# Altium PCB FPGA.PcbDoc
Units mm, origin at the board's own origin, x right, y up, seen from the top; angles counter-clockwise.
Board outline 17.78 x 55.24 mm, 2 copper layers (Top Layer, Bottom Layer); 56 components, 66 nets, 267 pads, 76 vias.
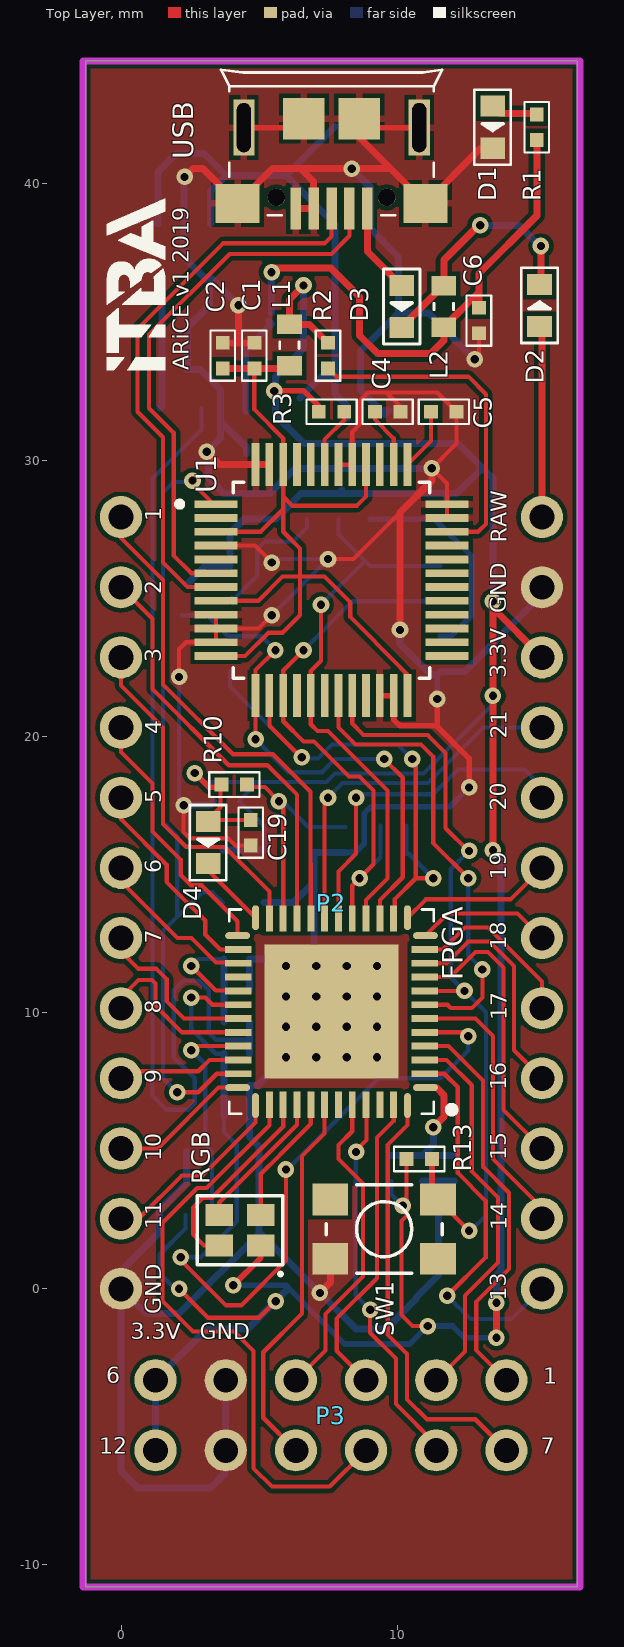
[diagram p0: Top Layer view]
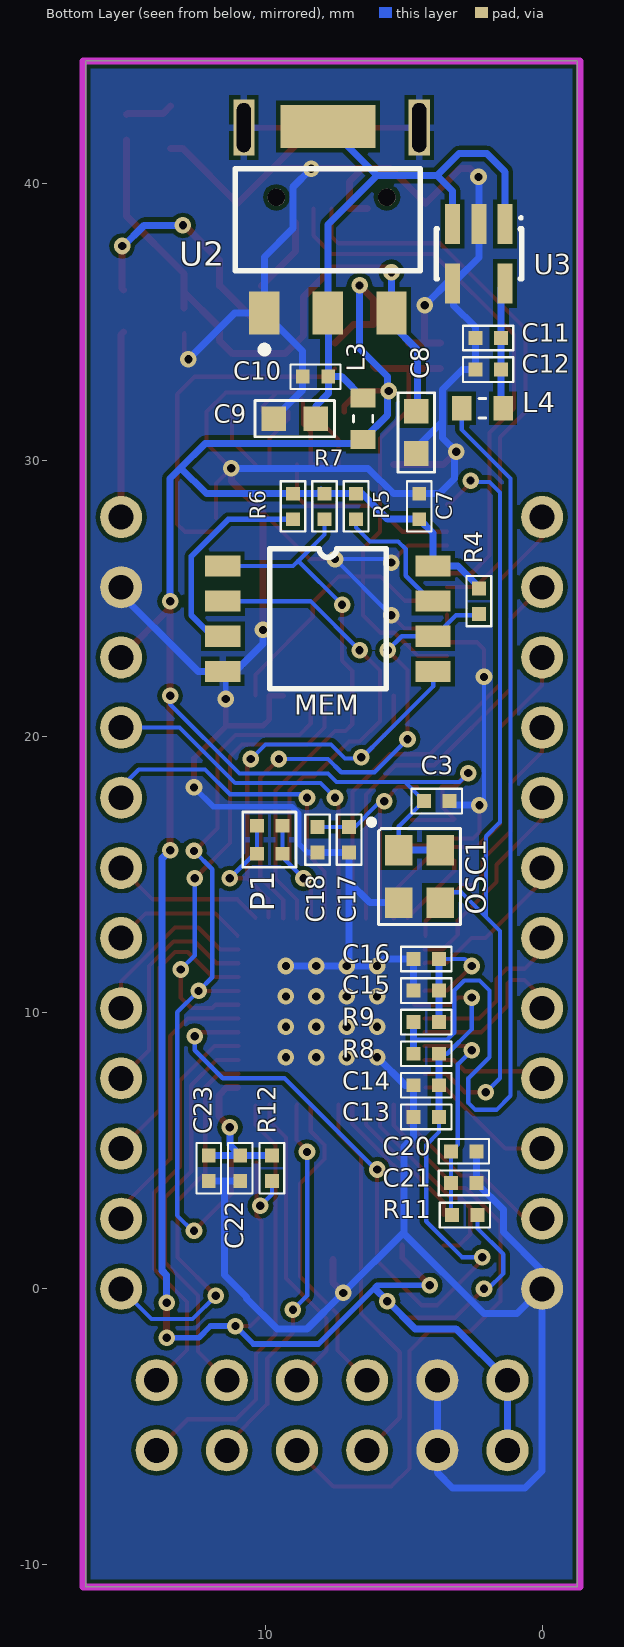
[diagram p1: Bottom Layer view, seen from below]

## Layer stack, top to bottom
Top Solder: solder mask 0.0102, Solder Resist, Dk 3.5
Top Layer: signal copper 0.0356
Dielectric1: dielectric 0.32, FR-4, Dk 4.8
Bottom Layer: signal copper 0.0356
Bottom Solder: solder mask 0.0102, Solder Resist, Dk 3.5

## Board outline
-1.27,-10.795 -1.27,44.45 16.51,44.45 16.51,-10.795 -1.27,-10.795

## Design rules (kind name [scope] priority, off if disabled: settings)
Clearance [All] p1: gap=0.152 ignorepadtopadclearanceinfootprint=FALSE
DiffPairsRouting [All] p1: maxlimit=0.254 minlimit=0.254 mostfreqgap=0.254 toplayer_minwidth=0.381 toplayer_maxwidth=0.381 toplayer_prefwidth=0.381 bottomlayer_minwidth=0.381 bottomlayer_maxwidth=0.381 bottomlayer_prefwidth=0.381 maxuncoupledlength=12.7
PlaneClearance [All] p1: clearance=0.2
PlaneConnect [All] p1: planeconnectstyle=Relief reliefexpansion=0.5 reliefentries=4 reliefconductorwidth=0.254 reliefairgap=0.2
PolygonConnect PolygonConnect_ReliefFLASH [HasFootprint('SOP8FLASHCORRECT')] p1: connectstyle=Relief reliefconductorwidth=0.254 reliefentries=4 polygonreliefangle="90 Angle" airgapwidth=0.15
PolygonConnect PolygonConnect_ReliefUSB [HasFootprint('MICRO-USB5+4P-SMD-0.65-B')] p2: connectstyle=Relief reliefconductorwidth=0.254 reliefentries=4 polygonreliefangle="90 Angle" airgapwidth=0.15
PolygonConnect PolygonConnect_ReliefFTDI [HasFootprint('QFP50P900X900X160-48N')] p3: connectstyle=Relief reliefconductorwidth=0.254 reliefentries=4 polygonreliefangle="90 Angle" airgapwidth=0.15
PolygonConnect [All] p4: connectstyle=Direct reliefconductorwidth=0.25 reliefentries=4 polygonreliefangle="90 Angle" airgapwidth=0.2
RoomDefinition Misc [InComponentClass('Misc')] p1: confinementstyle=ConfineIn formatcopy=TRUE lockcomponents=FALSE outline -2.3,-11.5 16.95,-11.5 16.95,45.1 -2.3,45.1
RoomDefinition FTDI [InComponentClass('FTDI')] p2: confinementstyle=ConfineIn formatcopy=TRUE lockcomponents=FALSE outline -1.9,-11.3 17.05,-11.3 17.05,44.8 -1.9,44.8
RoomDefinition FPGA [InComponentClass('FPGA')] p3: confinementstyle=ConfineIn formatcopy=TRUE lockcomponents=FALSE outline -1.65,-10.7 16.7,-10.7 16.7,44.5 -1.65,44.5
RoutingVias [All] p1: holewidth=0.3 width=0.6 viastyle="Through Hole" minholewidth=0.3 minwidth=0.6 maxholewidth=0.3 maxwidth=0.6
SilkToSolderMaskClearance SilkscreenOverComponentPads [IsPad] p1: minsilkscreentomaskgap=0.152 clearancetoexposedcopper=TRUE
SolderMaskExpansion [All] p1: expansion=0.102 istentingtop=FALSE
Width [All] p1: maxlimit=0.254 minlimit=0.152 preferedwidth=0.203 minimp=50.000000 maximp=50.000000 favimp=50.000000
26 further rules are at their usual default settings.

## Classes and differential pairs
component class fpga: 1.1 C13 C14 C15 C16 C17 C18 C19 C20 C21 C22 C23 D4 FPGA R8 R9 R10 R11 R12 R13 RGB SW1
component class FTDI: 1.1 C1 C2 C3 C4 C5 C6 D1 D2 D3 L1 L2 OSC1 R1 R2 R3 U1 USB
component class Misc: C7 C8 C9 C10 C11 C12 L3 L4 MEM P1 P2 P3 R4 R5 R6 R7 REG1 U2 U3
differential pair USBD: +USBD_P -USBD_N
differential pair IOB_2A: +IOB_2A_P -IOB_2A_N
differential pair IOB_4A: +IOB_4A_P -IOB_4A_N
differential pair IOB_8A: +IOB_8A_P -IOB_8A_N
differential pair IOB_23B: +IOB_23B_P -IOB_23B_N
differential pair IOT_37A: +IOT_37A_P -IOT_37A_N
differential pair IOT_39A: +IOT_39A_P -IOT_39A_N
differential pair IOT_43A: +IOT_43A_P -IOT_43A_N
differential pair IOT_44B: +IOT_44B_P -IOT_44B_N
differential pair IOT_49A: +IOT_49A_P -IOT_49A_N
differential pair IOT_51A: +IOT_51A_P -IOT_51A_N

## Components (designator, comment, footprint, x,y, rotation, side; value= is the part's Value field where it differs from the comment)
C1 "Cap Semi" C0402 4.826,33.782 r0 top
C2 "Cap Semi" C0402 3.683,33.782 r0 top
C3 "Cap Semi" C0402 3.81,17.653 r270 bottom
C4 "Cap Semi" C0402 9.652,31.75 r270 top
C5 "Cap Semi" C0402 11.684,31.75 r270 top
C6 "Cap Semi" C0402 12.954,35.052 r180 top
C7 "Cap Semi" C0402 4.445,28.321 r180 bottom
C8 "Cap" C0603 4.55,31 r0 bottom
C9 "Cap" C0603 8.95,31.5 r90 bottom
C10 "Cap" C0402 8.2,33.02 r90 bottom
C11 "Cap" C0402 1.95,34.417 r90 bottom
C12 "Cap" C0402 1.95,33.274 r90 bottom
C13 "Cap Semi" C0402 4.191,6.223 r90 bottom
C14 "Cap Semi" C0402 4.191,7.366 r90 bottom
C15 "Cap Semi" C0402 4.191,10.795 r90 bottom
C16 "Cap Semi" C0402 4.191,11.938 r90 bottom
C17 "Cap Semi" C0402 6.985,16.256 r0 bottom
C18 "Cap Semi" C0402 8.128,16.256 r0 bottom
C19 "Cap Semi" C0402 4.699,16.51 r180 top
C20 "Cap Semi" C0402 2.832,4.974 r270 bottom
C21 "Cap Semi" C0402 2.832,3.831 r270 bottom
C22 "Cap Semi" C0402 10.922,4.363 r0 bottom
C23 "Cap Semi" C0402 12.065,4.363 r0 bottom
D1 "LED3" LED-0603 13.45,42.05 r270 top
D2 "CDBU0520" CDBU0520 15.15,35.6 r90 top
D3 "CDBU0520" CDBU0520 10.16,35.56 r270 top
D4 "CDBU0520" CDBU0520 3.15,16.15 r270 top
FPGA "iCE40-UP5K" SLAB-QFN48-7X7-MD 7.62,10.033 r180 top
L1 "FB_60ohm" J1-0603 6.096,34.163 r90 top
L2 "600 OHM 800MA" J1-0603 11.684,35.56 r270 top
L3 "600 OHM 800MA" J1-0603 6.477,31.496 r90 bottom
L4 "600 OHM 800MA" J1-0603 2.159,31.877 r180 bottom
MEM "FlashMemory" SOP8FLASHCORRECT 11.557,26.162 r180 bottom
OSC1 "MEMS SiT1602" OSCMEMS1602 3.683,15.875 r270 bottom
P1 "Header 2X2" 4X4HEADERSQ 9.906,16.256 r90 bottom
P2 "FPGA Side Pins" "FPGA SIDE PINS" 7.616,15.236 r0 top
P3 "FPGA Front Pins" "FPGA FRONT PINS" 6.33,-3.31 r0 top
R1 "Res3" R0402 15.05,42.05 r180 top
R2 "Res3" R0402 7.493,33.782 r0 top
R3 "Res3" R0402 7.62,31.75 r270 top
R4 "Res3" R0402 2.286,24.892 r0 bottom
R5 "Res3" R0402 6.731,28.321 r0 bottom
R6 "Res3" R0402 9.017,28.321 r0 bottom
R7 "Res3" R0402 7.874,28.321 r0 bottom
R8 "Res3" R0402 4.191,8.509 r90 bottom
R9 "Res3" R0402 4.191,9.652 r90 bottom
R10 "Res3" R0402 4.1,18.25 r270 top
R11 "Res3" R0402 2.794,2.667 r270 bottom
R12 "Res3" R0402 9.779,4.363 r180 bottom
R13 "Res3" R0402 10.795,4.699 r270 top
RGB "LED RGB-CLMVB-FKA" LEDRGB 3.556,2.667 r0 top
SW1 "311020045" SW4-SMD-4.2X3.2X2.5MM 9.525,2.159 r0 top
U1 "FT232HL-REEL" QFP50P900X900X160-48N 7.62,25.654 r0 top
U2 "TLV1117LV33" ZZ311 7.75,38.7 r180 bottom
U3 "LP5907MFX-1.2" 1-2REGULATOR 2.286,37.211 r0 bottom
USB "320010000" MICRO-USB5+4P-SMD-0.65-B 7.62,38.862 r180 top

## Footprints (in the part's own frame and the unit in brackets; to place one, negate y for a bottom-side part, rotate by r counter-clockwise, add the part's x,y. Pads: shape width x height; smd on the part's side, far side on the other; paste and mask are expansions set on the pad)
1-2REGULATOR [mm]
  rect 0.55x1.45 smd: 1(-0.95,-1.329) 2(0,-1.329) 3(0.95,-1.329) 4(0.95,0.821) 5(-0.95,0.821)
  silkscreen extent -1.57,-1.6 1.55,0.65, body extent -1.5,-1.5 1.5,1, height 1.08
4X4HEADERSQ [mil]
  rect 19.69x19.69 smd: 1(-20,16.42) 2(20,16.42) 3(-20,-20) 4(20,-20)
  silkscreen extent -39,-39 39,37
C0402 [mm]
  rect 0.5x0.5 smd: 1(0,0.463) 2(0,-0.463)
  silkscreen extent -0.45,-0.91 0.45,0.91, body extent -0.25,-0.5 0.25,0.5, height 0.48
C0603 [mil]
  rect 35x35 smd: 1(0,30) 2(0,-30)
  silkscreen extent -26,-57 26,57, body extent -16,-31 16,31, height 31
CDBU0520 [mil]
  rect 30x35 smd: +(-30,0) -(30,0)
  silkscreen extent -54,-26 54,26, body extent -32,-16 31,16, height 28
"FPGA FRONT PINS" [mil]
  round 60 hole 35.43: 1(300,0) 2(200,0) 3(100,0) 4(0,0) 5(-100,0) 6(-200,0) 7(300,-100) 8(200,-100) 9(100,-100) 10(0,-100) 11(-100,-100) 12(-200,-100)
"FPGA SIDE PINS" [mil]
  round 60 hole 35.43: 1(-300,500) 2(-300,400) 3(-300,300) 4(-300,200) 5(-300,100) 6(-300,0) 7(-300,-100) 8(-300,-200) 9(-300,-300) 10(-300,-400) 11(-300,-500) 12(-300,-600) 13(300,-600) 14(300,-500) 15(300,-400) 16(300,-300) 17(300,-200) 18(300,-100) 19(300,0) 20(300,100) 21(300,200) 22(300,300) 23(300,400) 24(300,500)
  body extent -357,-650 357,550, height 129
J1-0603 [mm] "Chip Resistor, Body 1.6x0.8mm, IPC High Density"
  rect 0.7x0.9 smd: 1(-0.75,0) 2(0.75,0)
  silkscreen extent -0.12,-0.35 0.12,0.35, body extent -0.79,-0.39 0.81,0.41, height 0.78
LED-0603 [mil]
  rect 30x35 smd: +(-30,0) -(30,0)
  silkscreen extent -54,-26 54,26, body extent -32,-16 32,16, height 24
LEDRGB [mm]
  rect 1x0.8 smd: 1(1.5,-1.1) 3(0,0) 4(1.5,0)
  rect 1x0.8 smd paste+0: 2(0,-1.1)
  silkscreen extent -0.8,-2.13 2.3,0.7, body extent -1.01,-1.96 2.49,0.84, height 1.95
MICRO-USB5+4P-SMD-0.65-B [mil]
  rect 15x60 smd: 1(-51.18,-9.84) 2(-25.59,-9.84) 3(0,-9.84) 4(25.59,-9.84) 5(51.18,-9.84)
  round 25 hole 25: A(-78.74,-25.59) A(78.74,-25.59)
  rect 62.99x55 smd: S1(-133.86,-16.81) S1(133.86,-16.81)
  rect 30x80 hole 20 slot 70 at 90 deg: S2(-125,-125) S2(125,-125)
  rect 59.06x59.06 smd: S3(-39.37,-137.8) S4(39.37,-137.8)
  silkscreen extent -157,-207 157,0, body extent -148,-221 148,-13, height 107
OSCMEMS1602 [mm]
  rect 1.1x1 smd: 1(0,-1.5) 2(1.9,-1.5) 3(1.9,0) 4(0,0)
  silkscreen extent -1.09,-2.56 2.69,0.74, body extent -0.31,-1.74 2.19,0.26, height 0.86
QFP50P900X900X160-48N [mm]
  rect 1.56x0.28 smd: 1(-4.18,2.75) 2(-4.18,2.25) 3(-4.18,1.75) 4(-4.18,1.25) 5(-4.18,0.75) 6(-4.18,0.25) 7(-4.18,-0.25) 8(-4.18,-0.75) 9(-4.18,-1.25) 10(-4.18,-1.75) 11(-4.18,-2.25) 12(-4.18,-2.75) 25(4.18,-2.75) 26(4.18,-2.25) 27(4.18,-1.75) 28(4.18,-1.25) 29(4.18,-0.75) 30(4.18,-0.25) 31(4.18,0.25) 32(4.18,0.75) 33(4.18,1.25) 34(4.18,1.75) 35(4.18,2.25) 36(4.18,2.75)
  rect 0.28x1.56 smd: 13(-2.75,-4.18) 14(-2.25,-4.18) 15(-1.75,-4.18) 16(-1.25,-4.18) 17(-0.75,-4.18) 18(-0.25,-4.18) 19(0.25,-4.18) 20(0.75,-4.18) 21(1.25,-4.18) 22(1.75,-4.18) 23(2.25,-4.18) 24(2.75,-4.18) 37(2.75,4.18) 38(2.25,4.18) 39(1.75,4.18) 40(1.25,4.18) 41(0.75,4.18) 42(0.25,4.18) 43(-0.25,4.18) 44(-0.75,4.18) 45(-1.25,4.18) 46(-1.75,4.18) 47(-2.25,4.18) 48(-2.75,4.18)
  silkscreen extent -5.6,-3.55 3.55,3.55, body extent -4.5,-4.48 4.5,4.52, height 1.56
R0402 [mm]
  rect 0.5x0.5 smd: 1(0,0.463) 2(0,-0.463)
  silkscreen extent -0.45,-0.91 0.45,0.91, body extent -0.17,-0.5 0.18,0.5, height 0.49
SLAB-QFN48-7X7-MD [mm] "QFN, 48-Leads, Body 7.00x7.00mm, Pitch 0.50mm, Thermal Pad 4.70x4.70mm, IPC Medium Density"
  rect 4.85x4.85 smd: 0(0,0)
  oval 0.9x0.25 smd: 1(-3.4,2.75) 12(-3.4,-2.75) 25(3.4,-2.75) 36(3.4,2.75)
  rect 0.95x0.25 smd: 2(-3.375,2.25) 3(-3.375,1.75) 4(-3.375,1.25) 5(-3.375,0.75) 6(-3.375,0.25) 7(-3.375,-0.25) 8(-3.375,-0.75) 9(-3.375,-1.25) 10(-3.375,-1.75) 11(-3.375,-2.25) 26(3.375,-2.25) 27(3.375,-1.75) 28(3.375,-1.25) 29(3.375,-0.75) 30(3.375,-0.25) 31(3.375,0.25) 32(3.375,0.75) 33(3.375,1.25) 34(3.375,1.75) 35(3.375,2.25)
  oval 0.25x0.9 smd: 13(-2.75,-3.4) 24(2.75,-3.4) 37(2.75,3.4) 48(-2.75,3.4)
  rect 0.25x0.95 smd: 14(-2.25,-3.375) 15(-1.75,-3.375) 16(-1.25,-3.375) 17(-0.75,-3.375) 18(-0.25,-3.375) 19(0.25,-3.375) 20(0.75,-3.375) 21(1.25,-3.375) 22(1.75,-3.375) 23(2.25,-3.375) 38(2.25,3.375) 39(1.75,3.375) 40(1.25,3.375) 41(0.75,3.375) 42(0.25,3.375) 43(-0.25,3.375) 44(-0.75,3.375) 45(-1.25,3.375) 46(-1.75,3.375) 47(-2.25,3.375)
  silkscreen extent -4.47,-3.7 3.7,3.7, body extent -3.49,-3.48 3.53,3.54, height 0.78
SOP8FLASHCORRECT [mil]
  rect 50x30 smd: 1(0,0) 2(0,-50) 3(0,-100) 4(0,-150) 5(299.84,-150) 6(299.84,-100) 7(299.84,-50) 8(299.84,0)
  silkscreen extent 67,-175 233,25, body extent -16,-181 314,31, height 91
SW4-SMD-4.2X3.2X2.5MM [mm]
  rect 1.3x1.15 smd: 1(-1.95,1.075) 2(1.95,1.075) 3(-1.95,-1.075) 4(1.95,-1.075)
  silkscreen extent -2.1,-1.6 2.1,1.6, body extent -2.46,-1.56 2.44,1.64, height 2.51
ZZ311 [mm] "SOT-223/SC-73; 4 Leads; Body 6.7 x 7.3 mm, inc. leads (LxW max)"
  rect 1.1x1.55 smd: 1(-2.3,-3.375) 2(0,-3.375) 3(2.3,-3.375)
  rect 3.45x1.55 smd: 4(0,3.375)
  silkscreen extent -3.35,-4.82 3.35,1.85, body extent -3.25,-3.48 3.25,3.48, height 1.65

## Part data
C1 C2 C3 C4 C5 C6 C7 C13 C14 C15 C16 C17 C18 C19 C20 C21 C22 C23: "Capacitor (Semiconductor SIM Model)"
C8 C9 C10 C11 C12: library part "Cap Semi", "Capacitor (Semiconductor SIM Model)"
D1: "Typical BLUE SiC LED"
D2 D3 D4: "DIODE SCHOTTKY 20V 500MA 0603"
FPGA: library part "iCE40-UP5K FPGA", "iCE40-UP5K FPGA"
L1 L2 L3 L4: library part Inductor, "Inductor"
MEM: library part W25Q32JVSSIQ, "IC FLASH 32M SPI 133MHZ 8SOIC"
OSC1: library part SIT1602AC-13-33E-12.000000G, "MEMS OSC XO 12.0000MHZ LVCMOS"
P1: "Header, 2-Pin, Dual row"
R1 R2 R3 R4 R5 R6 R7 R8 R9 R10 R11 R12 R13: "Resistor"
RGB: "LED RGB CLEAR 4PLCC SMD"
SW1: library part "PTS810 SJM 250 SMTR LFS", "SWITCH TACTILE SPST-NO 0.05A 16V"
U1: "IC HS USB TO UART/FIFO 48LQFP"
U2: library part TLV1117LV33DCYR, "IC REG LINEAR 3.3V 1A SOT223-4"
U3: library part LP5907MFX-1.2/NOPB, "IC REG LINEAR 1.2V 250MA SOT23-5"
USB: library part "USB MICRO B", "CONN USB MICRO B RECPT SMT R/A"

## Via types
v1: diameter 0.6, hole 0.3, Top Layer to Bottom Layer, tented both sides, 60 vias
v2: diameter 0.6, hole 0.3, Top Layer to Bottom Layer, tented bottom, 16 vias

## Nets (pads, with @x,y where several pads share a name; then routed paths per layer and width w, separated by ;. In a path a pad name is that pad's centre, name@x,y a point inside that pad or via, vN(x,y) a via of type N, cw(c..) or ccw(c..) an arc to the next point about the centre after c; other vN are vias at no path point)
5V: C6.2 C8.2 L2.2 R1.1 U2.3 | length 23
  Top Layer w0.254: v1(5.45,36.8) 5.607,36.957 7.593,36.957 8.636,35.914 8.636,34.514 9.3,33.85 11.2,33.85 11.684,34.334 L2.2 12.954,36.08 ; C6.2 12.954,36.08 ; R1.1 15.05,38.844 12.954,36.748 12.954,36.08
  Bottom Layer w0.254: C8.2 4.5,31.812 4.5,33.975 5.447,34.922 U2.3@5.334,35.035 ; U2.3 v1(5.45,36.8)
+1.2V: L4.1 R8.1 R9.1 | length 37.7
  Bottom Layer w0.152: L4.1 2.909,31.103 1.143,29.337 1.143,6.985 1.651,6.477 2.413,6.477 2.667,6.731 2.667,7.62 1.905,8.382 1.905,10.795 2.265,11.155 2.815,11.155 3.175,10.795 3.175,9.271 3.429,9.017 4.654,9.017
  Bottom Layer w0.254: R8.1 4.654,9.017 R9.1
+3.3V: C3.2 C7.2 C19.2 D4.+ L1.2 L3.1 MEM.8 OSC1.1 OSC1.4 P2.22 P3.6 P3.12 R2.1 R3.2 R4.2 R5.2 R6.2 R7.2 R10.2 R11.1 R12.2 R13.2 RGB.1 | length 124.5
  Top Layer w0.152: v1(2.1,0) 3.15,-1.05 5,-1.05 v1(5.6,-0.45) ; R10.2@3.601,18.161 3.601,17.432 3.175,17.006 3.208,16.973 C19.2 ; v1(10.2,3) 10.282,3 v1@10.332,2.95 ; R13.2@10.332,4.572 v1@10.332,2.95 ; v1(11.1,-1.35) 10.55,-1.35 10.15,-0.95 10.15,2.453 10.332,2.636 v1@10.332,2.95
  Top Layer w0.203: v1(2.667,18.669) 3.175,18.161 R10.2@3.601,18.161 ; v1(4.064,0.127) 5.056,1.119 RGB.1 ; v1(5.55,32.5) 5.562,32.512 6.604,32.512 7.157,31.959 R3.2
  Top Layer w0.254: v1(6.604,36.322) 6.096,35.814 L1.2 6.825,34.913 R2.1 ; v1(13.462,15.875) v1(13.462,21.463) v1@13.462,24.638 ; v1(13.462,24.892) v1@13.462,24.638 ; v1(13.589,-1.778) v1(13.589,-0.508) ; P2.22@15.24,22.86 v1@13.462,24.638
  Bottom Layer w0.152: v1(2.1,0) 1.95,0 1.4,0.55 1.4,1.25 2.331,2.181 R11.1 ; v1(2.667,18.669) 2.992,18.344 4.963,18.344 ; OSC1.1 5.183,16.743 C3.2 4.963,18.344 ; 6.05,0 6.05,0.046 ; R12.2 9.779,3.421 v1(10.2,3) ; v1(13.462,21.463) 13.462,21.162 10.948,18.648 10.322,18.648 10.32,18.65 9.746,18.65 9.744,18.648 9.306,18.648 9.304,18.65 7.75,18.65 7.444,18.344 4.963,18.344
  Bottom Layer w0.203: v1(4.064,0.127) 5.969,0.127 6.05,0.046 8.096,-2 10.45,-2 v1(11.1,-1.35) 12,-1.35 12.428,-1.778 v1(13.589,-1.778) ; v1(5.55,32.5) 5.6,32.45 v1@5.6,32.25
  Bottom Layer w0.254: P3.12 P3.6 3.11,-1.45 4.6,-1.45 v1(5.6,-0.45) 6.05,0 ; R4.2@2.413,25.527 3.048,26.162 MEM.8 3.941,27.354 C7.2 5.588,27.858 6.513,28.784 R5.2 R7.2 ; OSC1.4 OSC1.1 ; v1@5.6,32.25 5.6,31.623 L3.1 6.616,30.607 12.192,30.607 13.081,29.718 ; v1@5.6,32.45 5.6,33.032 6.604,34.036 v1(6.604,36.322) ; R7.2@8.001,28.911 R7.2 ; v1(13.462,15.875) 13.75,15.587 13.75,0.65 13.589,0.489 v1(13.589,-0.508) ; v1(13.462,24.892) 13.462,29.337 13.081,29.718 ; R7.2 R6.2 12.147,28.784 13.081,29.718
CDONE: FPGA.7 U1.19 | length 16.8
  Top Layer w0.152: U1.19 7.87,20.324 8.488,19.706 10.863,19.706 11.3,19.269 11.3,16.132 v1(12.573,14.859) ; FPGA.7 11.815,10.283 11.938,10.16 12.7,10.16 13.081,10.541 v1(13.081,11.557)
  Bottom Layer w0.152: v1(12.573,14.859) 12.573,12.065 v1(13.081,11.557)
CRESET_B: FPGA.8 R13.1 SW1.2 U1.20 | length 28.4
  Top Layer w0.152: U1.20 8.37,20.459 8.779,20.05 11.1,20.05 11.75,19.4 11.75,16.673 v1@12.573,15.85 ; FPGA.8 v1(12.434,10.783) v1@12.446,10.795 ; SW1.2 11.391,3.15 11.55,3.15 v1(12.6,2.1)
  Top Layer w0.203: R13.1 11.258,3.451 SW1.2
  Bottom Layer w0.152: v1(12.6,2.1) 12.625,2.075 13.208,2.658 13.208,8.05 13.208,10.009 v1(12.434,10.783) 11.938,11.279 11.938,15.188 v1(12.6,15.85)
FLASH_MISO: FPGA.17 MEM.2 P1.3 P1.4 U1.15 | length 19.9
  Top Layer w0.152: v1(6.604,23.114) 5.87,22.38 U1.15 5.87,20.546 6.604,19.812 6.985,19.812 8.255,18.542 8.636,18.542 9.144,18.034 9.144,15.367 v1(8.636,14.859) 8.37,14.593 FPGA.17 ; FPGA.17@8.382,13.42 FPGA.17@8.399,13.437
  Bottom Layer w0.152: v1(6.604,23.114) 8.382,24.892 MEM.2 ; v1(8.636,14.859) P1.3@9.398,15.621 ; P1.3 P1.4
FLASH_MOSI: FPGA.14 MEM.5 P1.1 P1.2 U1.14 | length 20.5
  Top Layer w0.152: U1.14 5.37,20.38 6.509,19.241 v1(6.54,19.241) ; FPGA.14@9.906,13.444 9.906,14.097 10.668,14.859 ; v1(10.541,19.177) 10.541,19.05 10.668,18.923 10.668,14.859 ; v1(11.303,14.859) 10.668,14.859
  Bottom Layer w0.152: MEM.5 3.941,21.809 5.715,20.035 6.525,19.225 6.5,19.2 7.135,19.2 7.641,19.706 10.012,19.706 v1(10.541,19.177) ; P1.2 P1.1 10.414,15.748 v1(11.303,14.859)
GND: C1.1 C2.1 C3.1 C4.1 C5.1 C6.1 C7.1 C8.1 C9.1 C10.1 C11.1 C12.1 C13.1 C14.1 C15.1 C16.1 C17.1 C18.1 C19.1 C20.1 C21.1 C22.1 C23.1 D1.- FPGA.0 MEM.4 OSC1.2 P2.12 P2.23 P3.5 P3.11 SW1.3 U1.4 U1.9 U1.10 U1.11 U1.22 U1.23 U1.35 U1.36 U1.41 U1.42 U1.47 U1.48 U2.1 U3.2 U3.4 USB.4 USB.5 USB.S1 USB.S2 USB.S3 USB.S4 | length 195.1
  Top Layer w0.152: v1(2.1,22.15) 2.1,23.15 2.354,23.404 U1.11 U1.10 ; v1(2.265,17.505) 2.265,16.535 2.495,16.305 2.664,16.305 2.667,16.302 3.879,16.302 4.134,16.047 C19.1 ; U1.9 U1.10 ; U1.4 4.846,26.904 v1(5.461,26.289) ; v1(5.461,24.384) 4.981,23.904 U1.10 ; v1(7.493,26.416) 8.416,26.416 10.1,28.1 ; U1.42 U1.41 8.37,31.02 8.65,31.3 8.65,32.15 8.95,32.45 9.6,32.45 ; C4.1 10.115,31.935 9.6,32.45 ; U1.35 U1.36 11.8,29.15 v1(11.25,29.7) 12.147,30.597 C5.1 11.447,32.45 9.6,32.45 ; v1(12.8,33.65) 12.954,33.804 C6.1
  Top Layer w0.203: USB.S2@4.394,42.037 6.295,42.037 USB.S4 ; SW1.3@7.575,1.061 SW1.3 ; USB.S3 8.945,42.037 USB.S2@10.846,42.037 ; U1.22 U1.23 9.87,20.61 10.1,20.38 11.42,20.38 ; v1(11.45,21.35) 11.45,20.41 11.42,20.38 ; v1(12.6,18.15) 12.6,19.2 11.42,20.38
  Top Layer w0.254: v1(2.3,40.25) 2.6,40.55 2.959,40.55 4.22,39.289 5.481,40.55 6.5,40.55 ; v1(3.1,30.3) 3.566,29.834 U1.48 U1.47 ; C2.1 4.25,34.245 ; v1(4.25,35.6) 4.25,34.245 ; C1.1 4.25,34.245 ; USB.5 USB.4 6.97,40.08 6.5,40.55 ; v1(7.2,-0.15) 7.575,0.225 SW1.3@7.575,1.061 ; USB.S3 8.62,41.689 9.759,40.55 ; v1(10.1,23.85) 10.1,28.1 11.25,29.25 v1(11.25,29.7) ; D1.- 13.019,41.288 11.02,39.289 9.759,40.55 ; 6.5,40.55 v1(8.35,40.55) 9.759,40.55
  Bottom Layer w0.152: v1(2.1,22.15) 2.1,17.67 v1(2.265,17.505) ; v1(5.461,24.384) v1(7.493,26.416) 5.588,26.416 v1(5.461,26.289)
  Bottom Layer w0.203: C18.1 8.493,15.793 8.8,16.1 8.8,17.2 9.05,17.45 11.9,17.45 v1(12.6,18.15) ; v1(11.45,21.35) 11.45,22.245 MEM.4
  Bottom Layer w0.254: v1(2.265,17.505) 3.2,17.505 C3.1 ; v1(2.3,40.25) 2.286,40.236 U3.2 2.286,37.34 U3.4@3.063,36.563 ; C20.1 C21.1 1.4,2.862 1.4,2.05 0,0.65 P2.12@0,0 ; P3.5 P3.11 3.79,-6.66 3.236,-7.214 0.614,-7.214 0,-6.6 P2.12@0,0 ; v1(4.25,35.6) 3.287,36.563 U3.4@3.063,36.563 ; C8.1 4.55,30.45 3.6,31.4 ; C15.1 C16.1 5.715,11.938 v2(5.97,11.683) v2(7.07,11.683) ; 5,2.05 5,5.15 4.65,5.5 4.65,6.219 C13.1 C14.1 4.953,7.366 v2(5.97,8.383) ; OSC1.2 6.228,13.975 6.985,14.732 ; C18.1 C17.1 6.985,14.732 ; v1(8.35,40.55) 9.023,39.877 9.023,38.377 10.05,37.35 U2.1 ; v2(9.27,11.683) v2(8.17,11.683) v2(7.07,11.683) ; C9.1@9.562,31.65 9.7,31.788 9.412,31.788 8.663,32.537 C10.1 8.672,33.03 8.672,33.947 U2.1 ; v1(10.1,23.85) 10.1,23.35 11.205,22.245 MEM.4@11.45,22.245 ; C22.1 11.493,3.901 ; v1(11.25,29.7) 6.3,29.7 5.384,28.784 C7.1 3.716,28.784 3.166,29.334 3.166,30.234 v1(3.1,30.3) 3.6,30.8 3.6,31.4 ; MEM.4 12.446,22.352 14.041,23.947 14.041,23.941 15.24,25.14 P2.23@15.24,25.4 ; C23.1 11.493,3.901 ; v1(12.8,33.65) 11.125,35.325 U2.1 ; P2.12@0,0 0.9,-0.9 2.1,-0.9 5.025,2.025 v1(7.2,-0.15) 8.5,-1.45 9.6,-1.45 10.7,-0.35 10.7,-0.3 11.493,0.494 11.493,3.901 ; U3.4@3.063,36.563 U3.4 3.2,36.354 3.2,35.6 2.413,34.813 C11.1 C12.1 2.876,33.274 3.6,32.55 3.6,31.4 ; 6.985,14.732 6.985,11.768 v2(7.07,11.683)
  other v2: 7.07,8.383 8.17,8.383 9.27,8.383 5.97,9.483 7.07,9.483 8.17,9.483 9.27,9.483 5.97,10.583 7.07,10.583 8.17,10.583 9.27,10.583
ICE_CLK: FPGA.35 OSC1.3 U1.1 | length 29.5
  Top Layer w0.152: v1(2.032,7.112) 2.794,7.112 3.465,7.783 FPGA.35 ; v1(2.587,29.257) 2.587,29.163 3.346,28.404 U1.1
  Bottom Layer w0.152: v1(2.032,7.112) 1.524,7.62 1.524,12.954 2.032,13.462 ; v1(2.587,29.257) 2.54,29.21 1.905,29.21 1.524,28.829 1.524,16.891 2.032,16.383 2.032,13.462 ; OSC1.3 3.307,14.351 2.921,14.351 2.032,13.462
ICE_SCK: FPGA.15 MEM.6 R4.1 U1.13 | length 19.2
  Top Layer w0.152: v1(4.87,19.895) U1.13 4.87,22.396 v1(5.588,23.114) ; FPGA.15 9.37,14.069 10.2,14.899 10.2,18.502 v1(9.525,19.177)
  Bottom Layer w0.152: R4.1@2.204,24.384 3.11,24.384 3.872,23.622 MEM.6 5.08,23.622 v1(5.588,23.114) ; v1(4.87,19.895) 6.065,18.7 7.27,18.7 7.747,19.177 v1(9.525,19.177)
ICE_SS: FPGA.16 MEM.1 R7.1 U1.17 | length 20.2
  Top Layer w0.152: v1(7.239,24.765) 7.239,22.733 6.87,22.364 U1.17 6.87,20.435 7.112,20.193 7.493,20.193 9.65,18.036 9.65,14.857 8.87,14.077 FPGA.16
  Bottom Layer w0.152: v1(7.239,24.765) 8.826,26.352 ; R7.1 7.874,27.305 8.826,26.352 ; MEM.1 9.017,26.162 8.826,26.352
IOB_0A: FPGA.46
IOB_2A_N: FPGA.47 P3.3 | length 11.3
  Top Layer w0.152: P3.3 7.806,-2.246 7.806,-1.084 9.271,0.381 9.271,5.471 9.87,6.07 FPGA.47
IOB_2A_P: FPGA.44 P3.4 | length 11.6
  Top Layer w0.152: P3.4 7.4,-2.24 7.4,-0.915 8.763,0.448 8.763,3.81 7.874,4.699 7.874,5.207 8.37,5.703 FPGA.44 FPGA.44@8.382,6.646
IOB_4A_N: FPGA.48 P3.7 | length 15.6
  Top Layer w0.152: FPGA.48 10.37,5.925 9.652,5.207 9.652,-1.652 10.356,-2.356 10.356,-4.006 11.074,-4.724 12.824,-4.724 P3.7
IOB_4A_P: FPGA.45 P3.8 | length 13.9
  Top Layer w0.152: v1@8.636,4.953 8.636,5.136 8.89,5.39 8.89,6.638 FPGA.45 ; v1(9.017,-0.762) 9.017,-1.592 9.95,-2.525 9.95,-4.175 11.41,-5.635 P3.8
  Bottom Layer w0.152: v1@8.636,4.953 8.5,4.817 8.5,-0.245 v1(9.017,-0.762)
  other v1: 8.509,4.953
IOB_6A: FPGA.2 P2.13 | length 14.2
  Top Layer w0.152: FPGA.2 11.703,7.783 12.192,7.294 12.192,4.191 13.2,3.183 13.2,1.135 v1(11.811,-0.254)
  Bottom Layer w0.152: v1@11.804,-0.254 12.65,-1.1 14.14,-1.1 P2.13@15.24,0
IOB_8A_N: FPGA.4 P3.1 | length 14.8
  Top Layer w0.152: FPGA.4 11.858,8.783 13.106,7.534 13.106,4.42 14.05,3.476 14.05,0.715 12.856,-0.479 12.856,-2.216 P3.1
IOB_8A_P: FPGA.3 P3.2 | length 14.1
  Top Layer w0.152: FPGA.3 11.783,8.283 12.7,7.366 12.7,4.251 13.65,3.301 13.65,0.95 12.45,-0.25 12.45,-2.27 P3.2
IOB_13B: FPGA.6 P2.14 | length 10.1
  Top Layer w0.152: FPGA.6 11.68,9.783 11.684,9.779 12.827,9.779 13.462,9.144 13.462,4.699 15.24,2.921 P2.14@15.24,2.54
IOB_16A: FPGA.9 P2.15 | length 10.6
  Top Layer w0.152: FPGA.9 11.918,11.283 12.827,12.192 13.285,12.192 13.843,11.634 13.843,6.477 P2.15@15.24,5.08
IOB_18A: FPGA.10 P2.16 | length 8.4
  Top Layer w0.152: FPGA.10 11.783,11.783 12.573,12.573 13.335,12.573 14.224,11.684 14.224,8.636 P2.16@15.24,7.62
IOB_20A: FPGA.11 P2.17 | length 6.4
  Top Layer w0.152: FPGA.11 11.648,12.283 12.446,13.081 13.284,13.081 15.24,11.125 P2.17@15.24,10.16
IOB_23B_N: FPGA.12 P2.18 | length 4.9
  Top Layer w0.152: FPGA.12 11.826,13.589 14.351,13.589 P2.18@15.24,12.7
IOB_23B_P: FPGA.21 P2.2 | length 15.5
  Top Layer w0.152: P2.2@0,25.4 1.143,24.257 1.143,21.707 3.9,18.95 5.307,18.95 6.37,17.887 FPGA.21
IOB_24A: FPGA.13 P2.19 | length 5.6
  Top Layer w0.152: FPGA.13 11.034,14.097 14.097,14.097 P2.19@15.24,15.24
IOB_25B_G3: FPGA.20 P2.1 | length 18.2
  Top Layer w0.152: P2.1@0,27.94 0,27.178 1.524,25.654 1.524,21.876 4.05,19.35 5.5,19.35 6.858,17.992 6.858,15.391 6.87,15.379 FPGA.20
IOB_29B: FPGA.19 P2.21 | length 13.2
  Top Layer w0.152: FPGA.19 7.37,14.482 7.366,14.486 7.366,17.653 v1(7.493,17.78)
  Bottom Layer w0.152: v1(7.493,17.78) 8.022,18.309 11.109,18.309 13.12,20.32 P2.21@15.24,20.32
IOB_31B: FPGA.18 P2.20 | length 12.4
  Top Layer w0.152: FPGA.18 7.87,14.728 ; 7.874,14.732 7.87,14.728 ; v1(8.509,17.78) 8.509,15.748 7.87,15.109 7.87,14.728
  Bottom Layer w0.152: v1(8.509,17.78) 8.629,17.9 11.3,17.9 12.2,18.8 14.6,18.8 15.24,18.16 P2.20@15.24,17.78
IOT_37A_N: FPGA.25 P2.4 | length 9.5
  Top Layer w0.152: P2.4@0,20.32 0,19.431 1.143,18.288 1.143,16.557 2.159,15.541 2.159,14.986 2.54,14.605 2.921,14.605 4.22,13.306 FPGA.25
IOT_37A_P: FPGA.23 P2.3 | length 12.5
  Top Layer w0.152: P2.3@0,22.86 0,21.844 1.524,20.32 1.524,16.826 2.35,16 2.538,16 2.54,15.998 3.752,15.998 5.37,14.38 FPGA.23
IOT_39A_N: FPGA.27 P2.6 | length 6
  Top Layer w0.152: P2.6@0,15.24 0,14.75 2.05,12.7 2.553,12.7 3.442,11.811 4.217,11.811 FPGA.27
IOT_39A_P: FPGA.26 P2.5 | length 7.6
  Top Layer w0.152: P2.5@0,17.78 0,17 1.651,15.349 1.651,14.732 3.048,13.335 3.048,12.827 3.592,12.283 FPGA.26
IOT_41A: FPGA.28
IOT_43A_N: FPGA.31 P2.7 | length 6.2
  Top Layer w0.152: P2.7@0,12.7 0,12.217 0.635,11.582 1.286,11.582 1.651,11.217 1.651,10.414 2.282,9.783 FPGA.31
IOT_43A_P: FPGA.32 P2.8 | length 6.1
  Top Layer w0.152: P2.8@0,10.16 0,10.541 0.635,11.176 1.118,11.176 1.245,11.049 1.245,10.246 2.207,9.283 FPGA.32
IOT_44B_N: FPGA.34 P2.9 | length 4.5
  Top Layer w0.152: P2.9@0,7.62 0.254,7.874 2.794,7.874 3.203,8.283 FPGA.34
IOT_44B_P: FPGA.37 P2.11 | length 6.9
  Top Layer w0.152: P2.11@0,2.54 0.64,2.54 2.2,4.1 2.95,4.1 4.87,6.02 FPGA.37
IOT_49A_N: FPGA.36 P2.10 | length 5.1
  Top Layer w0.152: P2.10@0,5.08 1.33,5.08 3.533,7.283 FPGA.36
IOT_49A_P: FPGA.43
IOT_51A_N: FPGA.38 P3.9 | length 22.1
  Top Layer w0.152: FPGA.38 5.37,5.92 3.1,3.65 2.761,3.65 1.5,2.389 1.5,-0.45 2.6,-1.55 4.1,-1.55 4.8,-2.25 4.8,-6.502 5.461,-7.163 7.557,-7.163 P3.9
IOT_51A_P: FPGA.42 P3.10 | length 13.9
  Top Layer w0.152: P3.10 5.15,-4.67 5.15,-2.3 6.55,-0.9 6.55,4.8 7.37,5.62 FPGA.42
NetC1_2: C1.2 C2.2 L1.1 U1.3 U1.8 U1.12 U1.24 U1.40 U1.46 | length 32.8
  Top Layer w0.152: U1.12 4.489,22.904 5.334,23.749 5.842,23.749 6.477,24.384 6.477,25.781 ; U1.8 4.965,24.904 5.842,25.781 6.477,25.781 ; U1.3 5.054,27.404 5.87,28.22 ; C1.2 4.826,31.827 5.87,30.783 U1.46 5.87,28.674 ; U1.40 8.87,28.682 8.538,28.35 6.194,28.35 5.87,28.674 ; U1.24 10.37,22.23 10.1,22.5 10.1,22.514 8.3,24.314 8.3,24.85 7.369,25.781 6.477,25.781 ; 5.87,28.22 5.87,28.674 ; 5.87,28.22 5.87,27.404 6.477,26.797 6.477,25.781
  Top Layer w0.254: C2.2 C1.2 6.002,33.319 L1.1
NetC4_2: C4.2 U1.38 | length 2.2
  Top Layer w0.152: C4.2 9.189,31.467 9.87,30.787 U1.38
NetC5_2: C5.2 U1.37 | length 2.3
  Top Layer w0.152: U1.37 11.221,30.685 C5.2
NetD1_1: D1.+ R1.2 | length 1.7
  Top Layer w0.254: D1.+ 13.712,42.55 15.013,42.55 R1.2
NetD2_2: D2.- D3.- L2.1 | length 9.1
  Top Layer w0.254: D3.-@10.16,34.81 11.66,36.31 L2.1 11.684,37.234 12.95,38.5 v1(13,38.5) ; D2.-@15.15,36.162 15.2,36.212 v1(15.2,37.75)
  Bottom Layer w0.254: v1(13,38.5) 14.4,38.5 15.2,37.7 v1(15.2,37.75)
NetD3_1: D3.+ USB.1 | length 2.8
  Top Layer w0.254: USB.1@8.92,38.604 8.92,37.55 D3.+@10.16,36.31
NetD4_2: D4.- FPGA.24 | length 2.8
  Top Layer w0.152: D4.-@3.175,15.506 3.175,15.128 FPGA.24
NetFPGA_39: FPGA.39 RGB.2 | length 7.7
  Top Layer w0.152: RGB.2 3.005,1.567 2.6,1.972 2.6,2.934 2.961,3.296 3.296,3.296 5.87,5.87 FPGA.39 FPGA.39@5.87,6.27
NetFPGA_40: FPGA.40 RGB.3 | length 5.2
  Top Layer w0.152: RGB.3 3.556,3.125 6.37,5.939 FPGA.40
NetFPGA_41: FPGA.41 RGB.4 | length 4.7
  Top Layer w0.152: RGB.4 5.056,4.153 5.75,4.847 5.75,4.85 6.87,5.97 FPGA.41
NetMEM_3: MEM.3 R6.1 | length 7.8
  Bottom Layer w0.203: R6.1 11.354,27.858 12.7,26.512 12.7,24.384 11.938,23.622 MEM.3
NetMEM_7: MEM.7 R5.1 | length 4.9
  Bottom Layer w0.152: MEM.7 4.01,24.892 4.932,25.814 4.932,26.776 5.207,27.051 6.223,27.051 6.731,27.559 R5.1
  Bottom Layer w0.254: MEM.7 MEM.7@4.012,24.963
NetR2_2: R2.2 U1.34 | length 12.3
  Top Layer w0.152: R2.2 7.792,33.02 12.573,33.02 13.208,32.385 13.208,27.686 12.926,27.404 U1.34
NetR3_1: R3.1 U1.43 | length 2.2
  Top Layer w0.152: U1.43 7.37,30.738 8.083,31.451 R3.1
RAW_VCC: D2.+ P2.24 | length 6.7
  Top Layer w0.254: D2.+@15.15,34.638 15.24,34.548 P2.24@15.24,27.94
USBD_N: U1.6 USB.2 | length 19.9
  Top Layer w0.152: U1.6 2.544,25.904 1.905,26.543 1.905,30.988 1.016,31.877 1.016,34.544 3.937,37.465 7.615,37.465 8.27,38.12 USB.2
USBD_P: U1.7 USB.3 | length 20.5
  Top Layer w0.152: U1.7 2.409,25.404 1.524,26.289 1.524,30.826 0.6,31.75 0.6,34.75 3.696,37.846 7.366,37.846 7.62,38.1 USB.3
VCC: C13.2 C14.2 FPGA.5 FPGA.30 R8.2 | length 32.6
  Top Layer w0.152: v1(2.159,1.143) 2.159,1.041 3.8,-0.6 4.353,-0.6 5.969,1.016 v1(5.969,4.318) ; v1(2.54,10.541) 3.048,10.541 3.306,10.283 FPGA.30 FPGA.30@4.626,10.283 ; FPGA.5 12.434,9.283 v1(12.573,9.144)
  Bottom Layer w0.152: v1(2.159,1.143) 2.893,1.143 4.191,2.441 4.191,5.207 3.728,5.67 C13.2 ; v1(2.54,10.541) 2.54,9.398 3.429,8.509 R8.2 ; v1(5.969,4.318) 6.018,4.318 9.32,7.62 11.557,7.62 12.573,8.636 v1@12.573,8.89
  Bottom Layer w0.254: C13.2 C14.2 R8.2
VCC_1.2V: C11.2 C12.2 L4.2 U3.5 | length 4.6
  Bottom Layer w0.254: U3.5 1.488,36.238 C11.2 C12.2 L4.2@1.488,32.052 ; L4.2 1.488,31.956 L4.2@1.488,32.052 ; L4.2@1.463,32.077 L4.2@1.488,32.052
VCC_3.3V: C9.2 C10.2 L3.2 U2.2 U2.4 U3.1 U3.3 | length 23
  Bottom Layer w0.254: U3.1 1.336,40.436 2,41.1 3,41.1 3.8,40.3 ; U3.3 3.236,39.736 3.8,40.3 ; L3.2 7.251,33.02 C10.2 ; U2.4 5.975,40.3 ; C9.2 8.188,31.962 7.737,32.413 C10.2 ; 3.8,40.3 5.975,40.3 ; 5.975,40.3 7.75,38.525 U2.2 7.737,35.312 C10.2
VCC_PLL: C15.2 C16.2 FPGA.29 R9.2 | length 5.7
  Top Layer w0.152: v1(2.54,11.684) 3.429,10.795 4.233,10.795 FPGA.29
  Bottom Layer w0.152: v1(2.54,11.684) 2.794,11.938 C16.2
  Bottom Layer w0.254: R9.2 C15.2 C16.2
VCCIO_0: C20.2 C21.2 FPGA.33 R11.2 | length 8.1
  Top Layer w0.152: v1(2.54,8.636) 2.687,8.783 FPGA.33
  Bottom Layer w0.152: v1(2.54,8.636) 3.048,8.128 3.048,5.221 C20.2 C21.2 3.295,2.705 R11.2
VCCIO_1: C17.2 C18.2 FPGA.22 R10.1 | length 7.9
  Top Layer w0.152: R10.1@4.527,18.161 5.207,18.161 5.651,17.716 v1@5.779,17.716 ; FPGA.22 v1@5.87,17.427
  Bottom Layer w0.152: v1@5.969,17.526 6.776,16.719 C17.2 C18.2
  other v1: 5.715,17.653
VCCIO_2: C22.2 C23.2 FPGA.1 R12.1 | length 5.6
  Top Layer w0.254: FPGA.1 11.417,7.283 11.7,7 11.7,6.239 v1(11.303,5.842)
  Bottom Layer w0.254: R12.1 C22.2 ; v1(11.303,5.842) 11.303,5.207 C22.2 ; C23.2 C22.2
pads on no net: SW1.1 SW1.4 U1.2 U1.5 U1.16 U1.18 U1.21 U1.25 U1.26 U1.27 U1.28 U1.29 U1.30 U1.31 U1.32 U1.33 U1.39 U1.44 U1.45 USB.A

## Polygon pours and split planes (outlines as drawn)
GND on Bottom Layer "GNDbottomPlane" (solid, remove dead copper, pour order 6): -1.38,44.45 16.62,44.45 16.62,-10.8 16.42,-10.6 -1.38,-10.6 -1.38,44.35
GND on Top Layer "GNDtopPlane" (solid, remove dead copper, pour order 4): -1.38,44.45 16.62,44.45 16.62,-10.8 -1.38,-10.8 -1.38,44.45

## Keep-outs
Keep-Out Layer:
  lines w0.254: -1.38,-10.8 16.62,-10.8 16.62,44.45 -1.38,44.45 -1.38,-10.8

## Silkscreen, mask and mechanical layers (free items; w line width, h text height)
Top Overlay:
  drawing of 1539 lines, arcs and shapes, not listed
  text "ARiCE v1 2019" at 2.65,33.25 h1 r90
  text "1" at 1.651,27.788 h1 r90
  text "RAW" at 14.159,27 h1 r90
  text "2" at 1.651,25.146 h1 r90
  text "GND" at 14.148,24.46 h1 r90
  text "3" at 1.651,22.682 h1 r90
  text "3.3V" at 14.148,22.1 h1 r90
  text "4" at 1.651,20.066 h1 r90
  text "21" at 14.159,19.913 h1 r90
  text "5" at 1.651,17.577 h1 r90
  text "20" at 14.148,17.312 h1 r90
  text "6" at 1.651,15.037 h1 r90
  text "19" at 14.148,14.807 h1 r90
  text "7" at 1.651,12.497 h1 r90
  text "18" at 14.148,12.267 h1 r90
  text "8" at 1.651,9.957 h1 r90
  text "17" at 14.159,9.727 h1 r90
  text "9" at 1.651,7.442 h1 r90
  text "16" at 14.148,7.187 h1 r90
  text "15" at 14.148,4.645 h1 r90
  text "10" at 1.651,4.623 h1 r90
  text "11" at 1.651,2.159 h1 r90
  text "14" at 14.159,2.109 h1 r90
  text "13" at 14.148,-0.433 h1 r90
  text "GND" at 1.651,-0.914 h1 r90
  text "3.3V" at 0.353,-2.032 h1
  text "GND" at 2.844,-2.032 h1
  text "6" at -0.533,-3.626 h1
  text "1" at 15.291,-3.631 h1
  text "12" at -0.787,-6.171 h1
  text "7" at 15.202,-6.166 h1
Bottom Solder:
  lines w0.152: 9.398,15.748 9.398,16.764 ; 10.323,15.748 10.323,16.764